# Altium PCB PCB1.PcbDoc (part 2 of 2)
Units mm, origin at the board's own origin, x right, y up, seen from the top; angles counter-clockwise.
Board outline 41.15 x 66.04 mm, 4 copper layers (Top Layer, Layer 1, Layer 2, Bottom Layer), stack 0.603 mm thick; 69 components, 38 nets, 199 pads, 412 vias.
Unrouted connection lines stored in the file: 4.
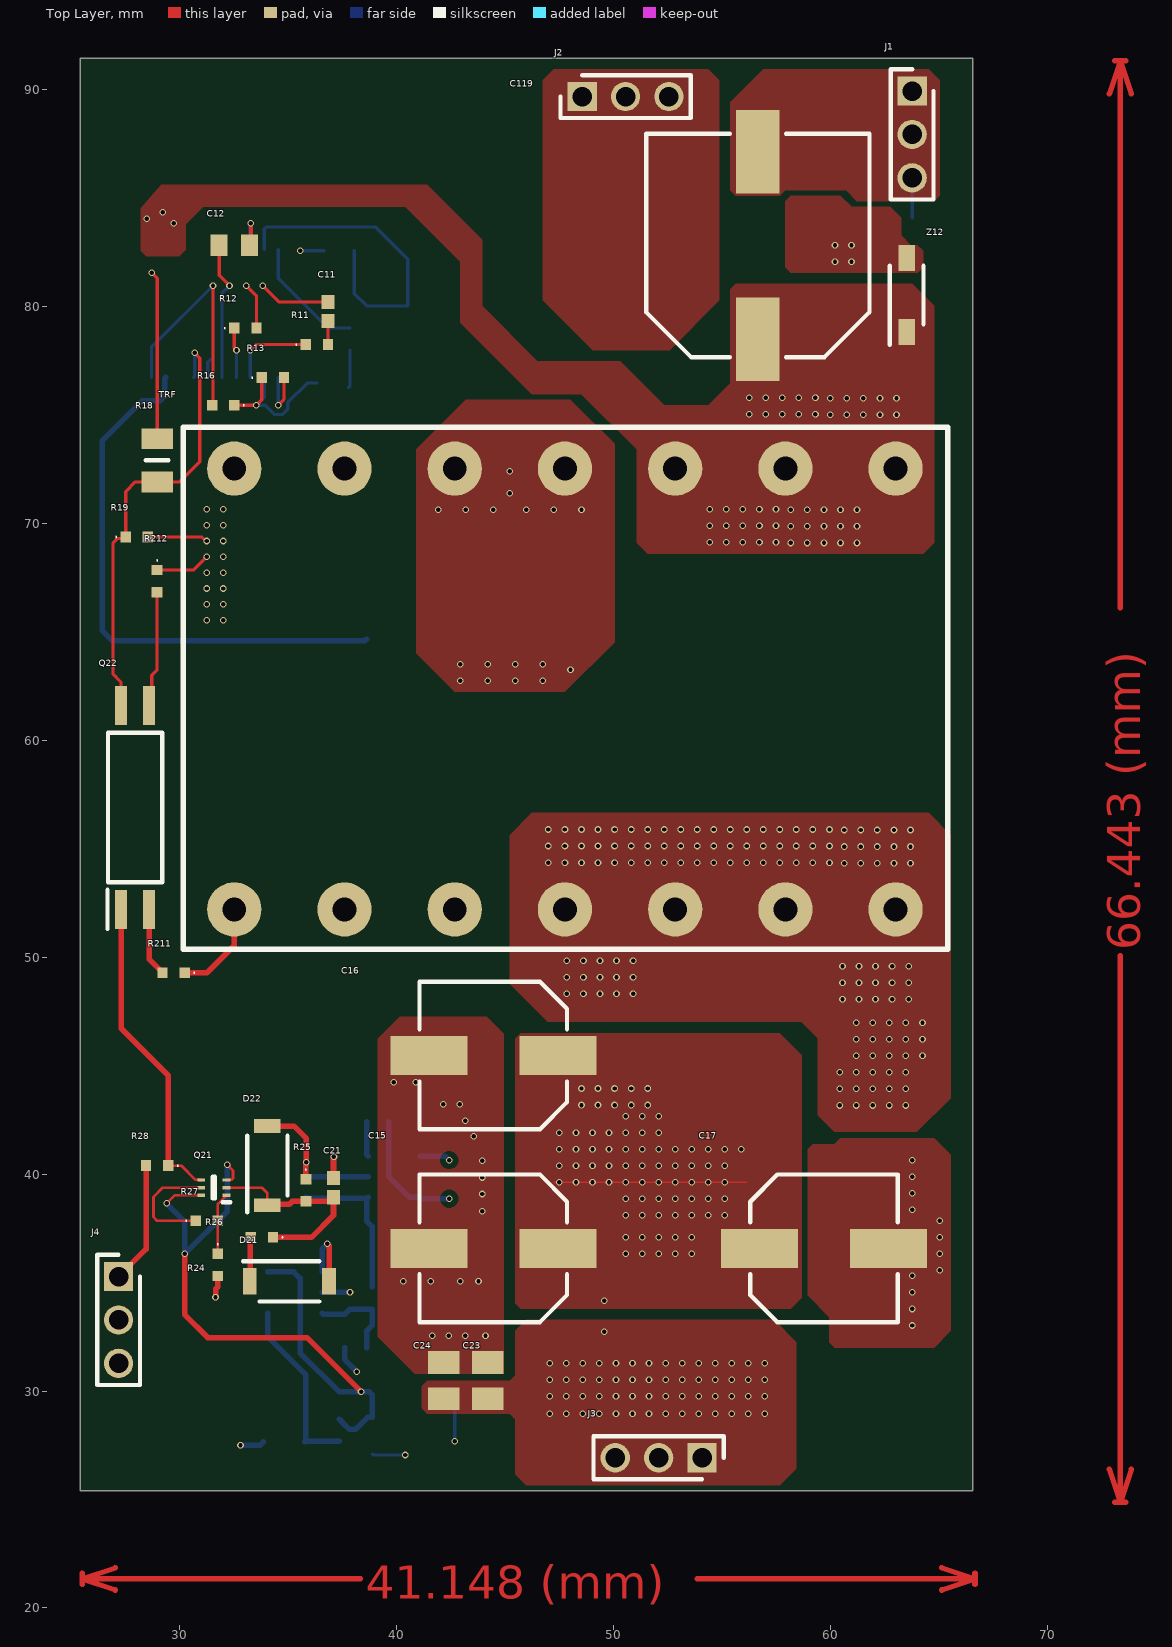
[diagram p0: Top Layer view]

## Polygon pours and split planes (outlines as drawn) (continued)
no net on Bottom Layer "NONET_L04_P010" (solid, pour order 10): 29.569,76.018 29.464,75.913
GND_out on Bottom Layer "GND_OUT_L04_P058" (solid, pour order 58): 43.846,30.372 44.546,30.372 44.958,30.784 44.958,34.036 45.212,34.29 45.212,46.736 44.45,47.498 41.91,47.498 41.402,46.99 41.402,43.18 43.434,41.148 43.434,30.784
GND_out on Bottom Layer "Bottom Layer-GND_out" (solid, pour order 56): 64.77,32.004 65.532,32.766 65.532,40.894 64.77,41.656 60.452,41.656 60.171,41.375 59.165,41.375 58.928,41.148 58.928,34.421 59.944,33.405 59.944,32.258 60.198,32.004
5V on Bottom Layer "5V_L04_P053" (solid, pour order 53): 39.597,29.305 39.664,29.372 41.496,29.372 41.496,28.572 40.796,28.572 40.479,28.255 38.127,28.255 38.127,29.305
Input on Bottom Layer "INPUT_L04_P047" (solid, pour order 47): 28.201,84.575 27.693,84.067 27.693,81.527 28.201,81.019 29.725,81.019 29.994,81.287 29.994,84.306 29.725,84.575
no net on Bottom Layer "NONET_L04_P044" (solid, pour order 44): 47.146,90.931 46.638,90.423 46.638,76.622 47.061,76.199 54.512,76.199 54.766,76.453 54.766,90.423 54.258,90.931
Input_PRO on Bottom Layer "INPUT_PRO_L04_P043" (solid, pour order 43): 47.244,90.564 46.736,90.056 46.736,76.256 47.159,75.833 54.61,75.833 54.864,76.087 54.864,90.057 54.356,90.564
GND on Bottom Layer "GND_L04_P041" (solid, pour order 41): 55.372,89.408 55.372,85.344 55.626,85.09 57.658,85.09 57.912,85.344 60.706,85.344 61.214,84.836 62.992,84.836 64.77,84.836 65.024,85.09 65.024,90.424 64.516,90.932 56.896,90.932
NetQ11_1 on Bottom Layer "NETQ11_1_L04_P038" (solid, pour order 38): 58.166,85.09 60.452,85.09 60.96,84.582 62.713,84.582 63.246,84.05 63.246,83.312 63.754,82.804 64.008,82.804 64.262,82.55 64.262,81.788 64.008,81.534 58.166,81.534 57.912,81.788 57.912,84.836
Vout on Bottom Layer "VOUT_L04_P032" (solid, pour order 32): 57.404,33.274 45.974,33.274 45.466,32.766 45.466,30.48 45.158,30.172 43.634,30.172 43.434,29.972 43.434,29.464 43.726,29.172 45.25,29.172 45.466,28.956 45.466,26.162 45.974,25.654 57.658,25.654 58.42,26.416 58.42,32.258
NetD_out_1 on Bottom Layer "Bottom Layer-NetD_out_1" (solid, pour order 24): 58.641,47.023 59.403,46.261 59.403,42.705 60.165,41.943 63.975,41.943 65.532,43.499 65.532,55.626 64.516,56.642 46.163,56.642 45.212,55.691 45.212,48.768 46.957,47.023
Out+ on Bottom Layer "OUT+_L04_P018" (solid, pour order 18): 45.466,46.228 45.466,34.036 45.886,33.616 58,33.616 58.674,34.29 58.674,45.466 57.658,46.482 45.72,46.482
NetD12_1 on Bottom Layer "NETD12_1_L04_P016" (solid, pour order 16): 50.292,63.754 53.086,63.754 53.594,64.262 56.388,64.262 56.642,64.008 56.642,62.23 56.134,61.722 50.292,61.722 50.038,61.976 50.038,63.5
NetC118_2 on Bottom Layer "NETC118_2_L04_P015" (solid, pour order 15): 54.864,67.056 56.134,67.056 56.388,66.802 56.388,65.278 56.134,65.024 53.594,65.024 53.086,65.532 53.086,66.04 53.34,66.294 53.365,66.269 54.098,66.269 54.098,66.29
NetD12_2 on Bottom Layer "NETD12_2_L04_P013" (solid, pour order 13): 43.18,75.692 48.006,75.692 50.038,73.66 50.038,69.088 51.054,68.072 53.848,68.072 54.356,67.564 54.356,66.802 54.102,66.548 53.086,66.548 52.832,66.294 52.832,65.024 52.07,64.262 49.784,64.262 47.752,62.23 42.672,62.23 40.894,64.008 40.894,73.406
NetNMOS1_3 on Bottom Layer "NETNMOS1_3_L04_P006" (solid, pour order 6): 30.226,77.418 29.769,77.418 29.769,74.879 30.48,74.168 33.274,74.168 34.29,73.152 34.29,71.628 33.02,70.358 33.02,66.548 34.036,65.532 39.624,65.532 40.132,66.04 40.132,70.358 39.624,70.866 36.068,70.866 35.56,71.374 35.56,73.152 34.036,74.676 30.734,74.676 30.226,75.184
Sense+ on Bottom Layer "SENSE+_L04_P004" (solid, pour order 4): 41.656,77.216 42.164,76.708 42.164,75.184 41.91,74.93 41.402,74.93 39.37,72.898 39.37,71.628 38.862,71.12 36.322,71.12 35.814,71.628 35.814,75.692 36.068,75.946 36.83,75.946 37.084,75.692 38.608,75.692 38.862,75.946 38.862,76.708 39.37,77.216
GND on Layer 1 "GND_L02_P067" (solid, pour order 67): 25.673,90.581 26.181,91.089 65.805,91.089 66.313,90.581 66.304,60.346 65.551,59.593 26.181,59.593 25.673,60.101
GND_out on Layer 1 "GND_OUT_L02_P064" (solid, pour order 64): 25.654,55.626 26.67,56.642 65.278,56.642 66.294,55.626 66.294,26.416 65.532,25.654 26.924,25.654 25.654,26.924
GND on Layer 2 "GND_L03_P066" (solid, pour order 66): 25.654,90.678 26.162,91.186 65.786,91.186 66.294,90.678 66.285,60.443 65.532,59.69 26.162,59.69 25.654,60.198
GND_out on Layer 2 "GND_OUT_L03_P065" (solid, pour order 65): 25.654,55.642 26.708,56.697 65.316,56.697 66.294,55.719 66.294,26.432 65.516,25.654 26.924,25.654 25.654,26.924

## Other copper
Top Layer:
  text "66.443 (mm)" at 74.27,50.317 h1.52 r90
  text "41.148 (mm)" at 38.562,20.422 h1.52